# Altium PCB 故指测试架LCD屏板.PcbDoc
Units mm, origin at the board's own origin, x right, y up, seen from the top; angles counter-clockwise.
Board outline 100 x 100 mm, 2 copper layers (Top Layer, Bottom Layer); 11 components, 9 nets, 44 pads, 0 vias.
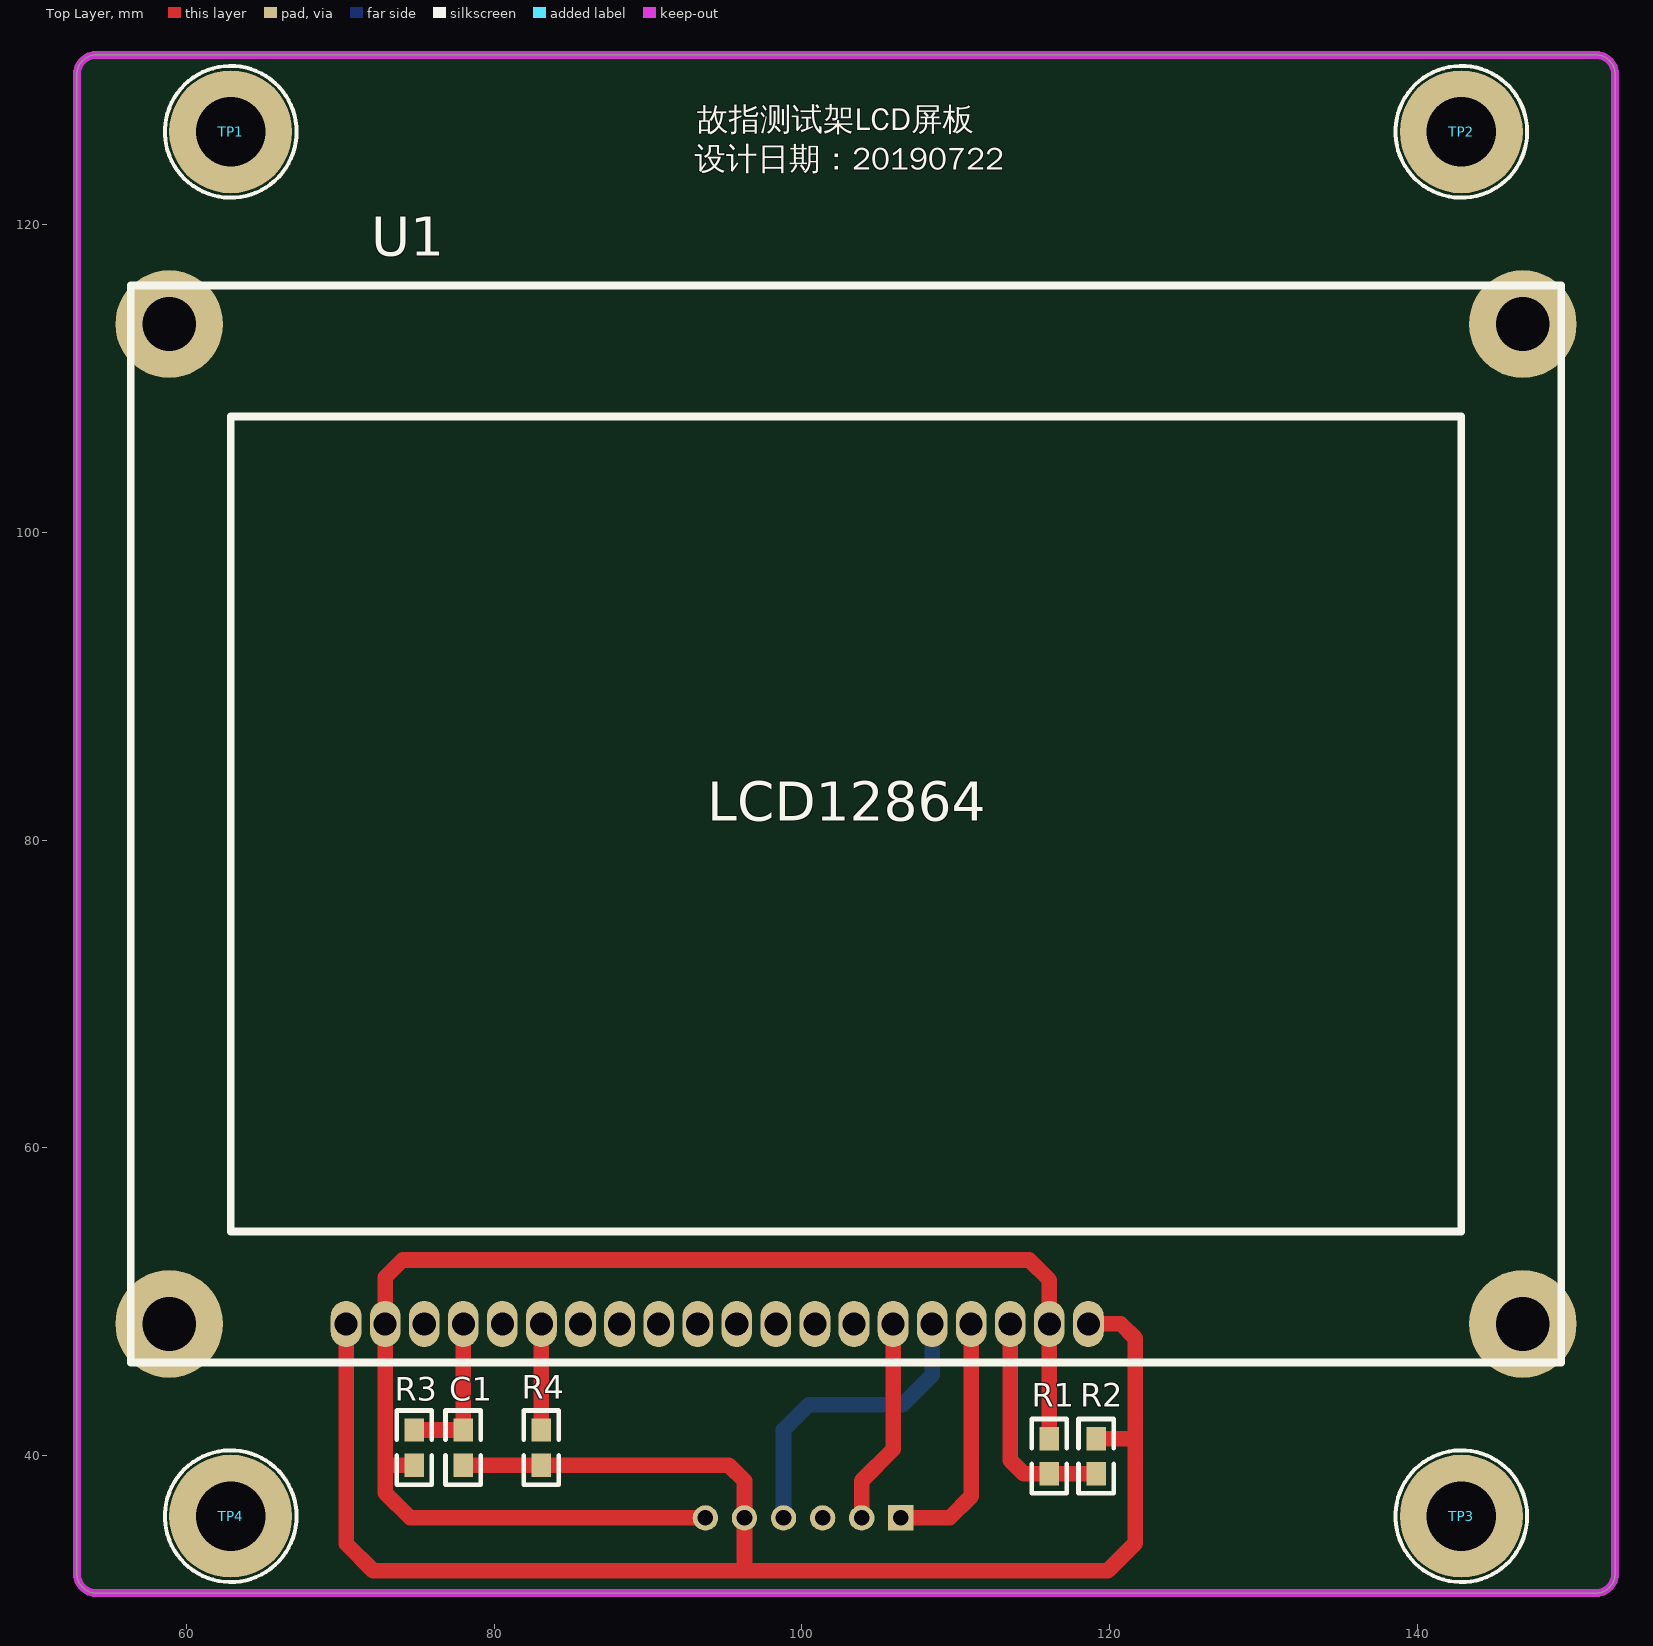
[diagram p0: Top Layer view]
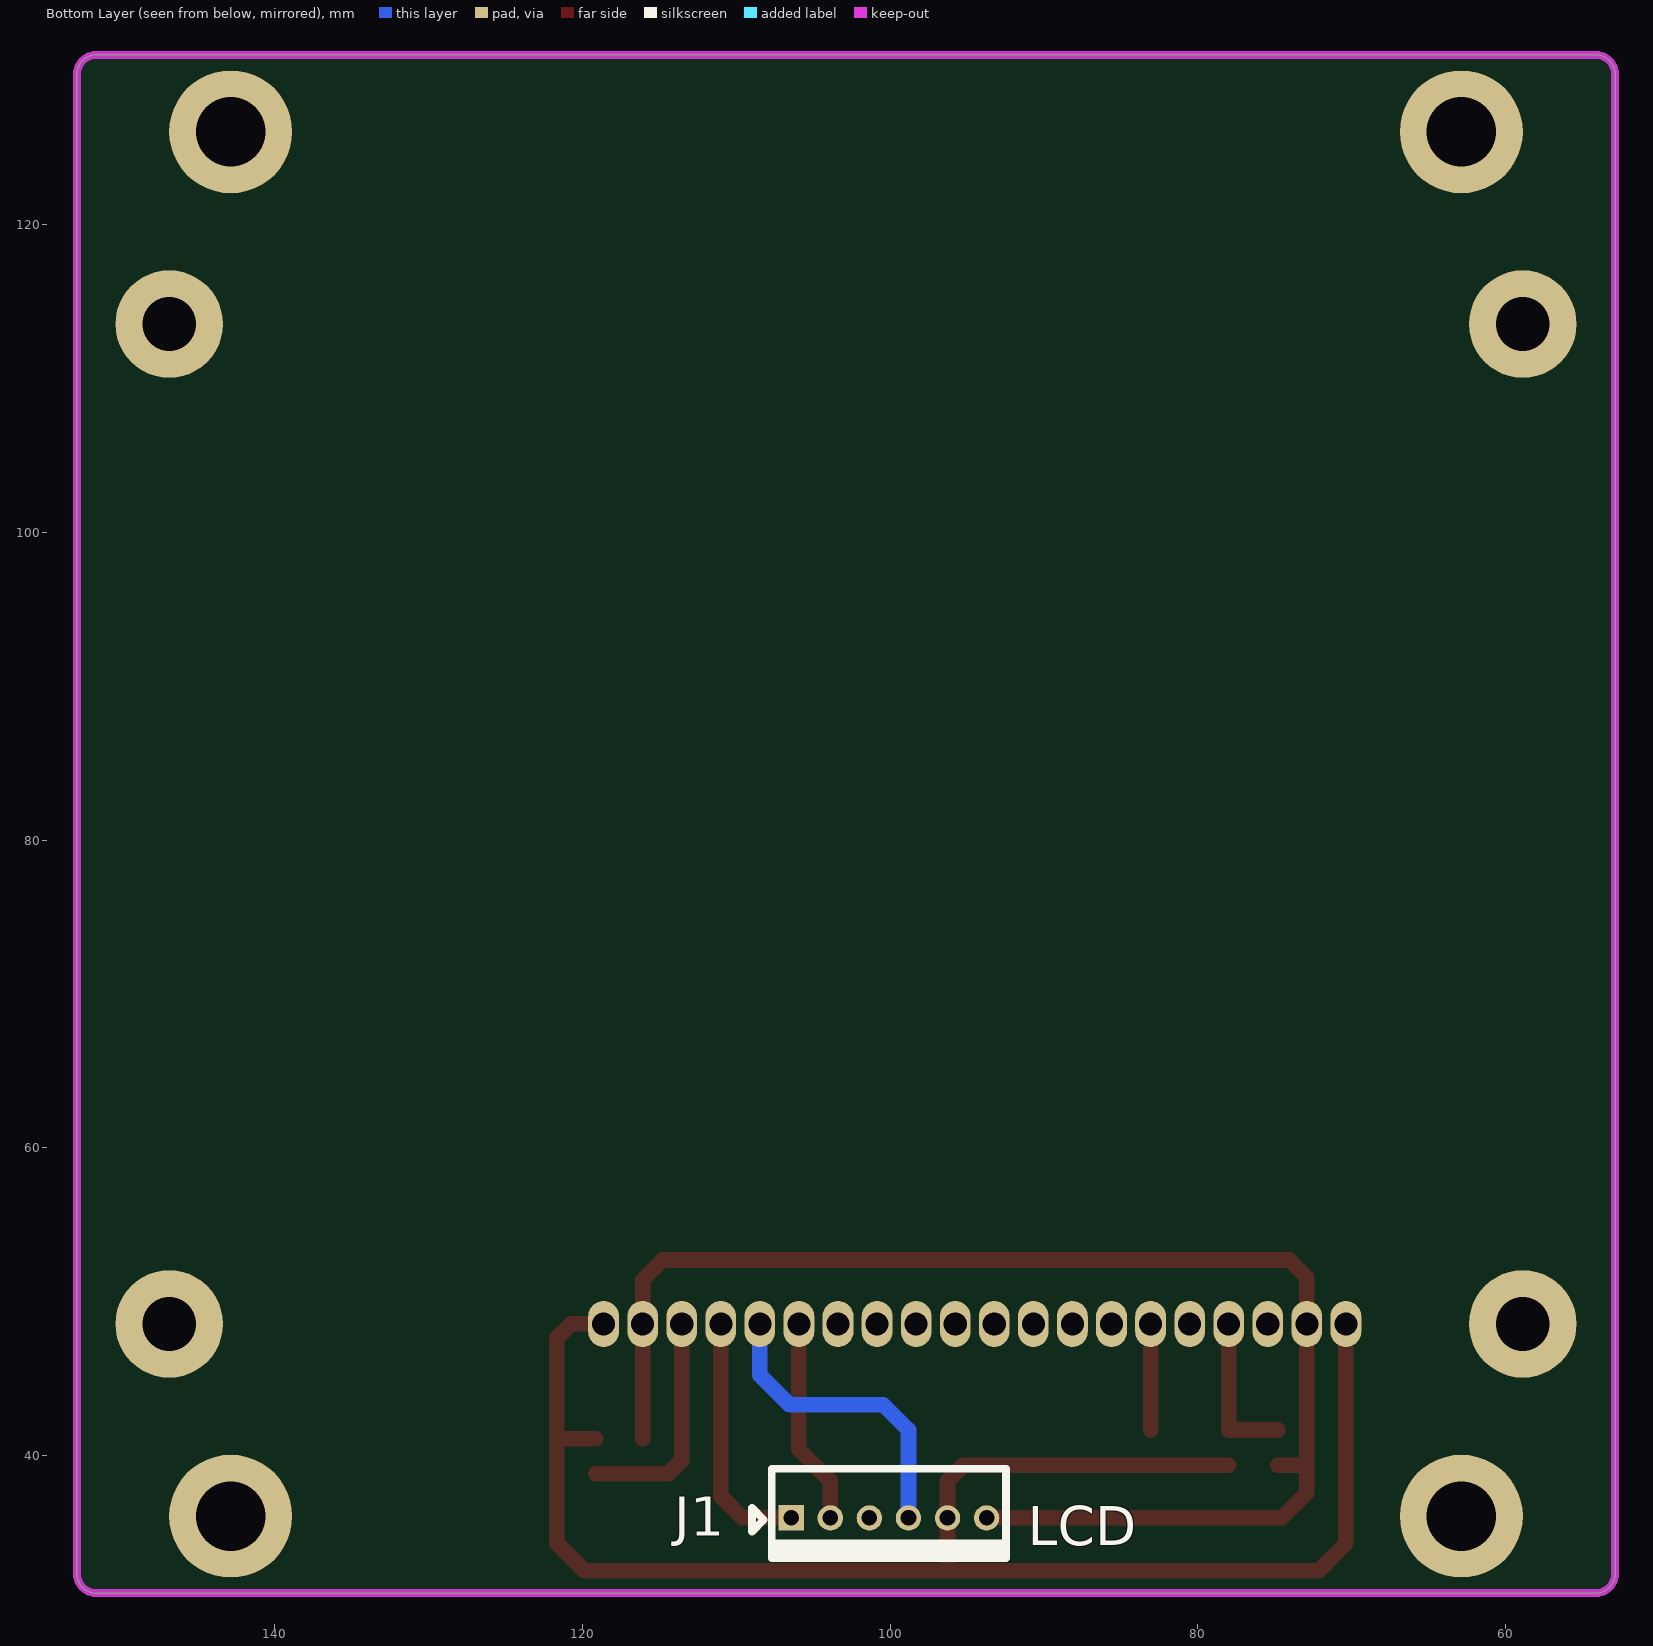
[diagram p1: Bottom Layer view, seen from below]

## Layer stack, top to bottom
Top Solder: solder mask 0.0102, Solder Resist, Dk 3.5
Top Layer: signal copper 0.0356
Dielectric 1: dielectric 0.32, FR-4, Dk 4.8
Bottom Layer: signal copper 0.0356
Bottom Solder: solder mask 0.0102, Solder Resist, Dk 3.5

## Board outline
52.867,32.323 52.867,129.783 cw(c54.137,129.783) 54.137,131.053 151.597,131.053 cw(c151.597,129.783) 152.867,129.783 152.867,32.323 cw(c151.597,32.323) 151.597,31.053 54.137,31.053 cw(c54.137,32.323)

## Design rules (kind name [scope] priority, off if disabled: settings)
Clearance [All] p1: gap=0.254 ignorepadtopadclearanceinfootprint=FALSE except(0: Arc-Hole Track-Hole SMDPad-Hole THPad-Hole Via-Hole Fill-Hole Poly-Hole Region-Hole Text-Hole)
HoleSize [All] p1: absolutevalues=TRUE maxlimit=5.08 minlimit=0.025 maxpercent=80.000 minpercent=20.000
PolygonConnect [All] p1: connectstyle=Relief reliefconductorwidth=0.254 reliefentries=4 polygonreliefangle="90 Angle" airgapwidth=0.254
RoutingVias [All] p1: holewidth=0.711 width=1.27 viastyle="Through Hole" minholewidth=0.711 minwidth=1.27 maxholewidth=0.711 maxwidth=1.27
SilkToSolderMaskClearance [IsPad] p1 off: minsilkscreentomaskgap=0.254 clearancetoexposedcopper=TRUE
SolderMaskExpansion [All] p1: expansion=0.102
Width [All] p1: maxlimit=5.08 minlimit=0.254 preferedwidth=0.508
28 further rules are at their usual default settings.

## Components (designator, comment, footprint, x,y, rotation, side; value= is the part's Value field where it differs from the comment)
C1 "0.1u" 0805 77.989,39.37 r90 top
J1 "LCD" 2510-6Y 106.426,35.941 r180 bottom locked
R1 "10k" 0805 116.067,41.097 r270 top
R2 "10k" 0805 119.137,38.811 r90 top
R3 "10k" 0805 74.814,39.37 r90 top
R4 "10k" 0805 83.069,39.37 r90 top
TP1 "" PAD4.5 62.867,126.053 r0 top locked
TP2 "" PAD4.5 142.867,126.053 r0 top locked
TP3 "" PAD4.5 142.867,36.053 r0 top locked
TP4 "" PAD4.5 62.867,36.053 r0 top locked
U1 "LCD12864" LCD12864 58.867,48.553 r0 top locked

## Footprints (in the part's own frame and the unit in brackets; to place one, negate y for a bottom-side part, rotate by r counter-clockwise, add the part's x,y. Pads: shape width x height; smd on the part's side, far side on the other; paste and mask are expansions set on the pad)
0805 [mil]
  rect 60x50 smd: 1(0,0.44) 2(90,0.44)
  silkscreen extent -50,-45 140,45
2510-6Y [mil]
  rect 65x65 hole 40: 1(0,0)
  round 65 hole 40: 2(100,0) 3(200,0) 4(300,0) 5(400,0) 6(500,0)
  silkscreen extent -100,-102 550,126
LCD12864 [mm]
  round 7 hole 3.5: 0(0,0) 0(0,65) 0(88,0) 0(88,65)
  oval 2x3 hole 1.5: 1(59.76,0) 2(57.22,0) 3(54.68,0) 4(52.14,0) 5(49.6,0) 6(47.06,0) 7(44.52,0) 8(41.98,0) 9(39.44,0) 10(36.9,0) 11(34.36,0) 12(31.82,0) 13(29.28,0) 14(26.74,0) 15(24.2,0) 16(21.66,0) 17(19.12,0) 18(16.58,0) 19(14.04,0) 20(11.5,0)
  silkscreen extent -2.5,-2.5 90.5,67.5
PAD4.5 [mm]
  round 8 hole 4.5: 0(0,0)
  silkscreen extent -4.28,-4.28 4.28,4.28

## Part data
C1: library part CAP, "Capacitor"
J1: library part CON6
R1 R2 R3 R4: library part R
TP1 TP2 TP3 TP4: library part TESTPT

## Nets (pads, with @x,y where several pads share a name; then routed paths per layer and width w, separated by ;. In a path a pad name is that pad's centre, name@x,y a point inside that pad or via, vN(x,y) a via of type N, cw(c..) or ccw(c..) an arc to the next point about the centre after c; other vN are vias at no path point)
+5VD: J1.6 R1.1 R3.1 U1.2 U1.19 | length 91.9
  Top Layer w1.016: R3.1 72.936,39.37 72.907,39.341 ; J1.6 74.549,35.941 72.907,37.583 72.907,39.341 ; R1.1 116.078,48.544 U1.2 116.087,51.4 114.783,52.705 74.041,52.705 72.907,51.571 U1.19 72.907,39.341
DGND: C1.1 J1.5 R2.2 R4.1 U1.1 U1.20 | length 110.9
  Top Layer w1.016: U1.20 70.367,34.281 72.136,32.512 96.266,32.512 ; C1.1 R4.1 95.25,39.37 96.266,38.354 J1.5 96.266,32.512 ; U1.1 120.738,48.553 121.666,47.625 121.666,41.148 ; R2.2 121.615,41.097 121.666,41.148 ; 96.266,32.512 119.888,32.512 121.666,34.29 121.666,39.37 121.666,41.148
NetC1_2: C1.2 R3.2 U1.17 | length 10.1
  Top Layer w1.016: R3.2 C1.2 77.987,41.665 U1.17
NetR1_2: R1.2 R2.1 U1.3 | length 14.8
  Top Layer w1.016: U1.3 113.547,39.691 114.427,38.811 R1.2 R2.1
NetR4_2: R4.2 U1.15 | length 6.9
  Top Layer w1.016: R4.2 83.067,41.665 U1.15
SPI3_MISO: J1.3
SPI3_MOSI: J1.4 U1.5 | length 20.2
  Bottom Layer w1.016: J1.4 98.806,41.656 100.457,43.307 106.553,43.307 108.467,45.221 U1.5
SPI3_NSS: J1.1 U1.4 | length 16.4
  Top Layer w1.016: J1.1 109.601,35.941 111.007,37.347 U1.4
SPI3_SCK: J1.2 U1.6 | length 13.5
  Top Layer w1.016: J1.2 103.886,38.354 105.927,40.395 U1.6
pads on no net: TP1.0 TP2.0 TP3.0 TP4.0 U1.0 U1.7 U1.8 U1.9 U1.10 U1.11 U1.12 U1.13 U1.14 U1.16 U1.18
copper on no net: | length 0.9
  Top Layer w2.54: 142.867,36.053 142.867,36.914

## Keep-outs
Keep-Out Layer:
  the board outline again, w0.508

## Silkscreen, mask and mechanical layers (free items; w line width, h text height)
Top Overlay:
  lines w0.013: 56.367,46.053 149.367,46.053 149.367,116.053 56.367,116.053 56.367,46.053 ; 62.867,54.553 62.867,107.553 142.867,107.553 142.867,54.553 62.867,54.553
  text "故指测试架LCD屏板" at 93.193,125.654 h2.54
  text "设计日期：20190722" at 93.04,123.114 h2.54
Mechanical 1:
  the board outline again, w0.508